# Altium PCB keyboard_3.0.PcbDoc
Units mil, origin at the board's own origin, x right, y up, seen from the top; angles counter-clockwise.
Board outline 4133.86 x 6102.36 mil, 2 copper layers (Top Layer, Bottom Layer); 89 components, 125 nets, 462 pads, 48 vias.
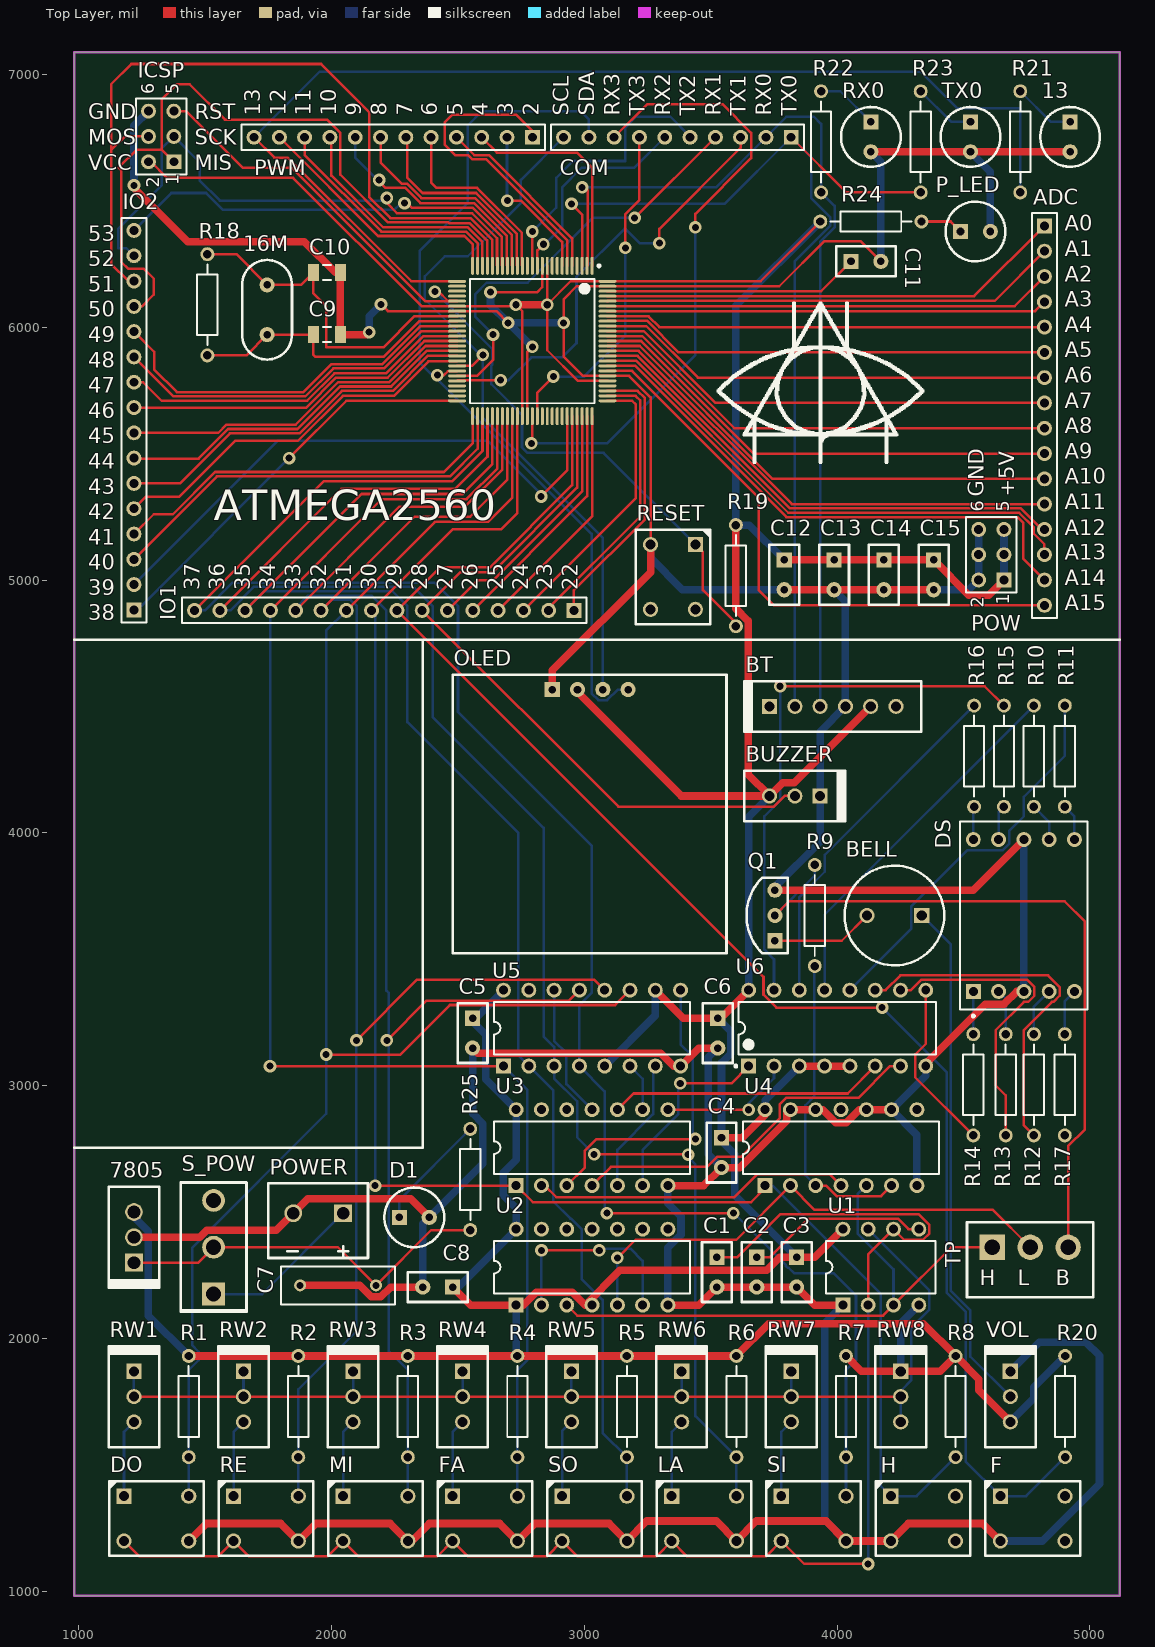
[diagram p0: Top Layer view]
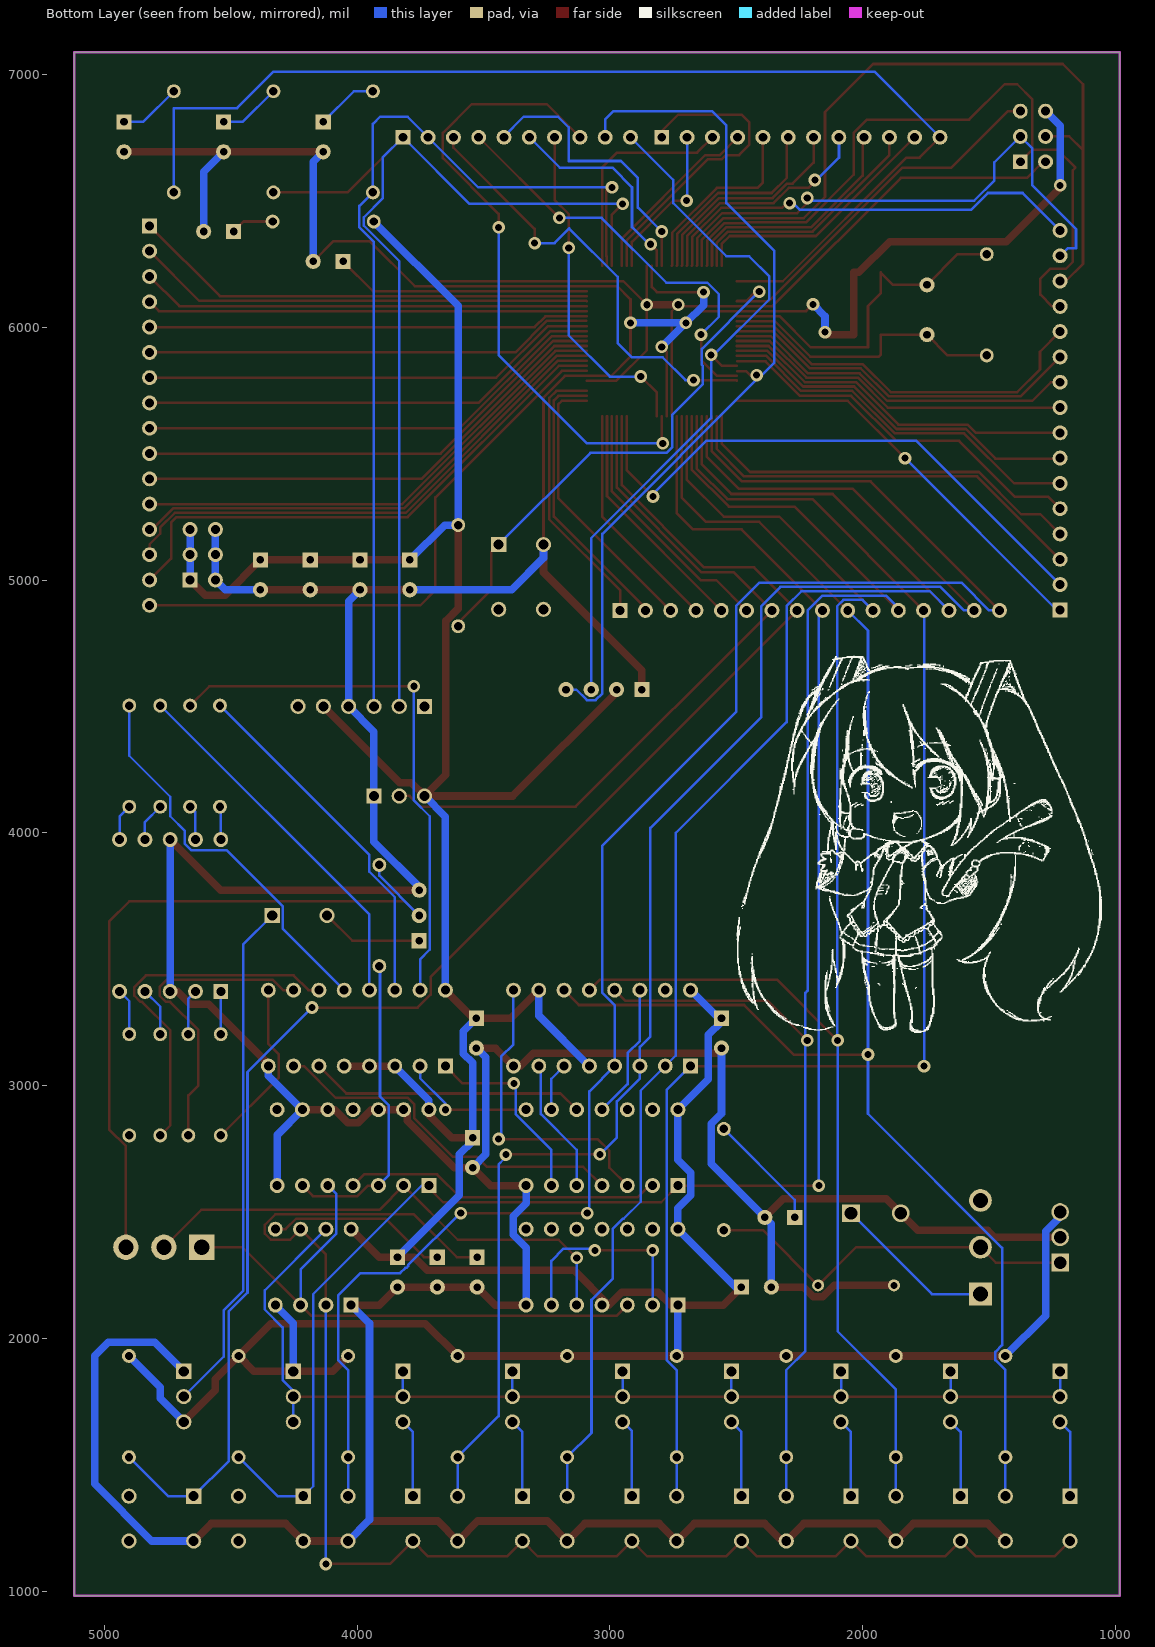
[diagram p1: Bottom Layer view, seen from below]

## Layer stack, top to bottom
Top Solder: solder mask 0.4, Solder Resist, Dk 3.5
Top Layer: signal copper 1.4
Dielectric1: dielectric 12.6, FR-4, Dk 4.8
Bottom Layer: signal copper 1.4
Bottom Solder: solder mask 0.4, Solder Resist, Dk 3.5

## Board outline
984.25,984.25 984.25,7086.61 5118.11,7086.61 5118.11,984.25

## Design rules (kind name [scope] priority, off if disabled: settings)
Clearance [All] p1: gap=7 ignorepadtopadclearanceinfootprint=FALSE except(0: Arc-Hole Track-Hole SMDPad-Hole THPad-Hole Via-Hole Fill-Hole Poly-Hole Region-Hole Text-Hole)
HoleSize [All] p1: absolutevalues=TRUE maxlimit=196.85 minlimit=0.98 maxpercent=80.000 minpercent=20.000
PolygonConnect [All] p1: connectstyle=Relief reliefconductorwidth=10 reliefentries=4 polygonreliefangle="90 Angle" airgapwidth=10
RoutingVias [All] p1: holewidth=15 width=35 viastyle="Through Hole" minholewidth=10 minwidth=30 maxholewidth=28 maxwidth=50
SolderMaskExpansion [All] p1: expansion=4
Width GND [InNet('GND')] p1: maxlimit=50 minlimit=10 preferedwidth=30
Width VCC [InNet('VCC')] p2: maxlimit=50 minlimit=10 preferedwidth=30
Width Width_other [All] p3: maxlimit=50 minlimit=10 preferedwidth=10
29 further rules are at their usual default settings.

## Classes and differential pairs
component class mega2560: 13 16M ADC C9 C10 C11 C12 C13 C14 C15 COM ICSP IO1 IO2 PWM R18 R19 R21 R22 R23 R24 RESET RX0 TX0
component class others: 7805 BT BUZZER C7 C8 D1 F OLED POWER R20 R25 S_POW TP
component class bell: BELL C4 H Q1 R8 R9 U3 U4 VOL
component class display: C5 C6 DS R10 R11 R12 R13 R14 R15 R16 R17 U5 U6
component class keyboard: C1 C2 C3 DO FA LA MI R1 R2 R3 R4 R5 R6 R7 RE RW1 RW2 RW3 RW4 RW5 RW6 RW7 RW8 SI SO U1 U2

## Components (designator, comment, footprint, x,y, rotation, side; value= is the part's Value field where it differs from the comment)
13 "LED" LED 4921.26,6811.02 r0 top
16M "CRYSTAL" CRYSTAL 1746.77,6166.88 r0 top
7805 "7805" 7805 1220.47,2401.57 r90 top
ADC "Header 16" HDR1X16 4820,6400 r270 top
ATMEGA2560 "ATmega2560-16AU" 100A_N 2795.28,5944.88 r270 top
BELL "BELL" BELL 4226.86,3673.77 r180 top
BT "BLUETOOTH" BLUETOOTH 3733.16,4500.54 r0 top
BUZZER "BUZZER" BUZZER 3833.16,4146.21 r180 top
C1 "0.1uF" CAP 3525.2,2322.83 r0 top
C2 "0.01uF" CAP 3682.68,2322.83 r0 top
C3 "0.1uF" CAP 3840.16,2322.83 r0 top
C4 "0.1uF" CAP 3543.31,2795.28 r0 top
C5 "0.1uF" CAP 2559.06,3267.72 r0 top
C6 "0.1uF" CAP 3528.35,3267.72 r0 top
C7 "Cap" RAD-0.3 2027.24,2211.57 r0 top
C8 "0.1uF" CAP 2480.31,2204.72 r270 top
C9 "Cap Semi" C1206 1982.99,5970.03 r180 top
C10 "Cap Semi" C1206 1982.99,6216.09 r180 top
C11 "0.1uF" CAP 4055.12,6259.84 r90 top
C12 "0.1uF" CAP 3791.35,5079.69 r0 top
C13 "0.1uF" CAP 3988.2,5079.69 r0 top
C14 "0.1uF" CAP 4185.05,5079.69 r0 top
C15 "0.1uF" CAP 4381.9,5079.69 r0 top
COM "Header 10" HDR1X10 3818.9,6750.39 r180 top
D1 "LED" LED 2269.65,2480.32 r90 top
DO "KEY" KEY_6*6 1181.1,1377.95 r0 top
DS "Dpy Blue-CC" H 4738.67,3673.77 r0 top
F "KEY" KEY_6*6 4645.67,1377.95 r0 top
FA "KEY" KEY_6*6 2480.32,1377.95 r0 top
H "KEY" KEY_6*6 4212.6,1377.95 r0 top
ICSP "Header 3X2" HDR2X3 1377.95,6653.54 r90 top
IO1 "Header 16" HDR1X16 2960,4880 r180 top
IO2 "Header 16" HDR1X16 1220.47,4881.89 r90 top
LA "KEY" KEY_6*6 3346.46,1377.95 r0 top
MI "KEY" KEY_6*6 2047.24,1377.95 r0 top
OLED "OLED" OLED_4pin 2874.02,4566.93 r0 top
P_LED "LED" LED 4488.19,6377.95 r90 top
POW "Header 3X2" HDR2X3 4659.93,5000 r90 top
POWER "INT" INT 2047.24,2496.78 r180 top
PWM "Header 12" HDR1X12 2795.28,6750.39 r180 top
Q1 "TRANSISTOR" TRANSISTOR 3754.42,3673.77 r90 top
R1 "Res2" AXIAL-0.4 1437.01,1732.28 r90 top
R2 "Res2" AXIAL-0.4 1870.08,1732.28 r90 top
R3 "Res2" AXIAL-0.4 2303.15,1732.28 r90 top
R4 "Res2" AXIAL-0.4 2736.22,1732.28 r90 top
R5 "Res2" AXIAL-0.4 3169.29,1732.28 r90 top
R6 "Res2" AXIAL-0.4 3602.36,1732.28 r90 top
R7 "Res2" AXIAL-0.4 4035.43,1732.28 r90 top
R8 "Res2" AXIAL-0.4 4468.5,1732.28 r90 top
R9 "Res2" AXIAL-0.4 3911.9,3673.77 r90 top
R10 "Res2" AXIAL-0.4 4778.04,4303.69 r270 top
R11 "Res2" AXIAL-0.4 4900.5,4303.69 r270 top
R12 "Res2" AXIAL-0.4 4778.04,3004.47 r90 top
R13 "Res2" AXIAL-0.4 4666.97,3004.47 r90 top
R14 "Res2" AXIAL-0.4 4538.67,3004.47 r90 top
R15 "Res2" AXIAL-0.4 4659.93,4303.69 r270 top
R16 "Res2" AXIAL-0.4 4541.82,4303.69 r270 top
R17 "Res2" AXIAL-0.4 4900.5,3004.47 r90 top
R18 "Res2" AXIAL-0.4 1510.55,6088.14 r270 top
R19 "Res2" AXIAL-0.4 3600,5017.32 r90 top
R20 "Res2" AXIAL-0.4 4901.57,1732.28 r90 top
R21 "Res2" AXIAL-0.4 4724.41,6732.28 r270 top
R22 "Res2" AXIAL-0.4 3937.01,6732.28 r270 top
R23 "Res2" AXIAL-0.4 4330.71,6732.28 r270 top
R24 "Res2" AXIAL-0.4 4133.86,6417.32 r180 top
R25 "Res2" AXIAL-0.4 2550,2630 r270 top
RE "KEY" KEY_6*6 1614.17,1377.95 r0 top
RESET "KEY" KEY_6*6 3440,5140 r270 top
RW1 "3296W" 3296W 1220.47,1771.65 r0 top
RW2 "3296W" 3296W 1653.54,1771.65 r0 top
RW3 "3296W" 3296W 2086.61,1771.65 r0 top
RW4 "3296W" 3296W 2519.68,1771.65 r0 top
RW5 "3296W" 3296W 2950,1771.65 r0 top
RW6 "3296W" 3296W 3385.83,1771.65 r0 top
RW7 "3296W" 3296W 3818.9,1771.65 r0 top
RW8 "3296W" 3296W 4251.97,1771.65 r0 top
RX0 "LED" LED 4133.86,6811.02 r0 top
S_POW "SSD1210" SS12D10 1535.43,2362.2 r90 top
SI "KEY" KEY_6*6 3779.53,1377.95 r0 top
SO "KEY" KEY_6*6 2913.39,1377.95 r0 top
TP "TEST" TEST 4763.78,2362.2 r0 top
TX0 "LED" LED 4527.56,6811.02 r0 top
U1 "NE555P" P008 4173.23,2283.46 r0 top
U2 "SN74LS74AN" N014D 3031.5,2283.46 r0 top
U3 "SN74LS04N" N014 3031.5,2755.91 r0 top
U4 "SN74LS126AN" N014 4015.75,2755.91 r0 top
U5 "SN74LS147N" N016 3031.5,3228.35 r0 top
U6 "SN74LS48N" N016D 4000.79,3228.35 r90 top
VOL "3296W" 3296W 4685.04,1771.65 r0 top

## Footprints (in the part's own frame and the unit in brackets; to place one, negate y for a bottom-side part, rotate by r counter-clockwise, add the part's x,y. Pads: shape width x height; smd on the part's side, far side on the other; paste and mask are expansions set on the pad)
100A_N [mm] "Thin QFP, 100-Leads, Body 14x14mm, Pitch 0.5mm, IPC Medium Density"
  oval 1.8x0.3 smd: 1(-7.55,6) 2(-7.55,5.5) 3(-7.55,5) 4(-7.55,4.5) 5(-7.55,4) 6(-7.55,3.5) 7(-7.55,3) 8(-7.55,2.5) 9(-7.55,2) 10(-7.55,1.5) 11(-7.55,1) 12(-7.55,0.5) 13(-7.55,0) 14(-7.55,-0.5) 15(-7.55,-1) 16(-7.55,-1.5) 17(-7.55,-2) 18(-7.55,-2.5) 19(-7.55,-3) 20(-7.55,-3.5) 21(-7.55,-4) 22(-7.55,-4.5) 23(-7.55,-5) 24(-7.55,-5.5) 25(-7.55,-6) 51(7.55,-6) 52(7.55,-5.5) 53(7.55,-5) 54(7.55,-4.5) 55(7.55,-4) 56(7.55,-3.5) 57(7.55,-3) 58(7.55,-2.5) 59(7.55,-2) 60(7.55,-1.5) 61(7.55,-1) 62(7.55,-0.5) 63(7.55,0) 64(7.55,0.5) 65(7.55,1) 66(7.55,1.5) 67(7.55,2) 68(7.55,2.5) 69(7.55,3) 70(7.55,3.5) 71(7.55,4) 72(7.55,4.5) 73(7.55,5) 74(7.55,5.5) 75(7.55,6)
  oval 0.3x1.8 smd: 26(-6,-7.55) 27(-5.5,-7.55) 28(-5,-7.55) 29(-4.5,-7.55) 30(-4,-7.55) 31(-3.5,-7.55) 32(-3,-7.55) 33(-2.5,-7.55) 34(-2,-7.55) 35(-1.5,-7.55) 36(-1,-7.55) 37(-0.5,-7.55) 38(0,-7.55) 39(0.5,-7.55) 40(1,-7.55) 41(1.5,-7.55) 42(2,-7.55) 43(2.5,-7.55) 44(3,-7.55) 45(3.5,-7.55) 46(4,-7.55) 47(4.5,-7.55) 48(5,-7.55) 49(5.5,-7.55) 50(6,-7.55) 76(6,7.55) 77(5.5,7.55) 78(5,7.55) 79(4.5,7.55) 80(4,7.55) 81(3.5,7.55) 82(3,7.55) 83(2.5,7.55) 84(2,7.55) 85(1.5,7.55) 86(1,7.55) 87(0.5,7.55) 88(0,7.55) 89(-0.5,7.55) 90(-1,7.55) 91(-1.5,7.55) 92(-2,7.55) 93(-2.5,7.55) 94(-3,7.55) 95(-3.5,7.55) 96(-4,7.55) 97(-4.5,7.55) 98(-5,7.55) 99(-5.5,7.55) 100(-6,7.55)
  silkscreen extent -7.67,-6.25 6.25,6.83, body extent -7,-7 7,7, height 1.2
3296W [mil]
  rect 60x60 hole 40: 1(0,100)
  round 60 hole 40: 2(0,0) 3(0,-100)
  silkscreen extent -100,-200 100,200
7805 [mil]
  rect 70x70 hole 50: 1(-100,0)
  round 70 hole 50: 2(0,0) 3(100,0)
  silkscreen extent -200,-100 200,100
AXIAL-0.4 [mm] "Axial Device, Thru-Hole; 2 Leads; 0.4 in Pin Spacing"
  round 1.4 hole 0.85: 1(-5.08,0) 2(5.08,0)
  silkscreen extent -4.06,-1.02 4.06,1.02
BELL [mil]
  rect 60x60 hole 40: 1(-108.27,0)
  round 60 hole 40: 2(108.27,0)
  silkscreen extent -197,-197 197,197
BLUETOOTH [mil]
  rect 60x60 hole 40: 1(0,0)
  round 60 hole 40: 2(100,0) 3(200,0) 4(300,0) 5(400,0) 6(500,0)
  silkscreen extent -100,-100 600,100
BUZZER [mil]
  rect 60x60 hole 40: 1(-100,0)
  round 60 hole 40: 2(0,0) 3(100,0)
  silkscreen extent -200,-100 200,100
C1206 [mm] "Chip Capacitor, Body 3.2x1.6mm, IPC High Density"
  rect 1.1x1.7 smd: 1(-1.35,0) 2(1.35,0)
  silkscreen extent -0.4,-0.75 0.4,0.75, body extent -1.7,-0.9 1.7,0.9, height 1.3
CAP [mil]
  rect 60x60 hole 30: 1(0,0)
  round 60 hole 30: 2(0,-118.11)
  silkscreen extent -59,-177 59,59
CRYSTAL [mil]
  round 60 hole 30: 1(0,0) 2(0,-196.85)
  silkscreen extent -98,-295 98,98
H [mm] "LED, 7-Segment Display, 14.2 mm, RHD; 10 Leads; Row Space 15.24 mm; Pitch 2.54 mm"
  rect 1.5x1.5 hole 0.9: 1(-5.08,-7.62)
  round 1.5 hole 0.9: 2(-2.54,-7.62) 3(0,-7.62) 4(2.54,-7.62) 5(5.08,-7.62) 6(5.08,7.62) 7(2.54,7.62) 8(0,7.62) 9(-2.54,7.62) 10(-5.08,7.62)
  silkscreen extent -6.4,-10.22 6.4,9.45, body extent -6.4,-9.45 6.4,9.45, height 8.25
HDR1X10 [mm] "Connector; Header; 10 Position"
  rect 1.5x1.5 hole 0.9: 1(0,0)
  round 1.5 hole 0.9: 2(2.54,0) 3(5.08,0) 4(7.62,0) 5(10.16,0) 6(12.7,0) 7(15.24,0) 8(17.78,0) 9(20.32,0) 10(22.86,0)
  silkscreen extent -1.27,-1.27 24.13,1.27
HDR1X12 [mm] "Connector; Header; 12 Position"
  rect 1.5x1.5 hole 0.9: 1(0,0)
  round 1.5 hole 0.9: 2(2.54,0) 3(5.08,0) 4(7.62,0) 5(10.16,0) 6(12.7,0) 7(15.24,0) 8(17.78,0) 9(20.32,0) 10(22.86,0) 11(25.4,0) 12(27.94,0)
  silkscreen extent -1.27,-1.27 29.21,1.27
HDR1X16 [mm] "Connector; Header; 16 Position"
  rect 1.5x1.5 hole 0.9: 1(0,0)
  round 1.5 hole 0.9: 2(2.54,0) 3(5.08,0) 4(7.62,0) 5(10.16,0) 6(12.7,0) 7(15.24,0) 8(17.78,0) 9(20.32,0) 10(22.86,0) 11(25.4,0) 12(27.94,0) 13(30.48,0) 14(33.02,0) 15(35.56,0) 16(38.1,0)
  silkscreen extent -1.27,-1.27 39.37,1.27
HDR2X3 [mm] "Connector; Header; 3x2 Position"
  rect 1.5x1.5 hole 0.9: 1(0,0)
  round 1.5 hole 0.9: 2(0,2.54) 3(2.54,0) 4(2.54,2.54) 5(5.08,0) 6(5.08,2.54)
  silkscreen extent -1.27,-1.27 6.35,3.81
INT [mil]
  rect 70x70 hole 50: 1(0,0)
  round 70 hole 50: 2(196.85,0)
  silkscreen extent -98,-118 295,177
KEY_6*6 [mil]
  rect 60x60 hole 39.37: 1(0,0)
  round 60 hole 39.37: 2(255.91,0) 3(0,-177.16) 4(255.91,-177.16)
  silkscreen extent -59,-236 315,59
LED [mil]
  rect 60x60 hole 30: 1(0,0)
  round 60 hole 30: 2(0,-118.11)
  silkscreen extent -118,-177 118,59
N014 [mm] "DIP; 14 Leads; Row Spacing 7.62 mm; Pitch 2.54 mm"
  rect 1.5x1.5 hole 0.9: 1(-7.62,-3.81)
  round 1.5 hole 0.9: 2(-5.08,-3.81) 3(-2.54,-3.81) 4(0,-3.81) 5(2.54,-3.81) 6(5.08,-3.81) 7(7.62,-3.81) 8(7.62,3.81) 9(5.08,3.81) 10(2.54,3.81) 11(0,3.81) 12(-2.54,3.81) 13(-5.08,3.81) 14(-7.62,3.81)
  silkscreen extent -9.85,-2.65 9.85,2.65
N014D [mm] "DIP; 14 Leads; Row Spacing 7.62 mm; Pitch 2.54 mm"
  rect 1.5x1.5 hole 0.9: 1(-7.62,-3.81)
  round 1.5 hole 0.9: 2(-5.08,-3.81) 3(-2.54,-3.81) 4(0,-3.81) 5(2.54,-3.81) 6(5.08,-3.81) 7(7.62,-3.81) 8(7.62,3.81) 9(5.08,3.81) 10(2.54,3.81) 11(0,3.81) 12(-2.54,3.81) 13(-5.08,3.81) 14(-7.62,3.81)
  silkscreen extent -9.85,-2.65 9.85,2.65
N016 [mm] "DIP; 16 Leads; Row Spacing 7.62 mm; Pitch 2.54 mm"
  rect 1.5x1.5 hole 0.9: 1(-8.89,-3.81)
  round 1.5 hole 0.9: 2(-6.35,-3.81) 3(-3.81,-3.81) 4(-1.27,-3.81) 5(1.27,-3.81) 6(3.81,-3.81) 7(6.35,-3.81) 8(8.89,-3.81) 9(8.89,3.81) 10(6.35,3.81) 11(3.81,3.81) 12(1.27,3.81) 13(-1.27,3.81) 14(-3.81,3.81) 15(-6.35,3.81) 16(-8.89,3.81)
  silkscreen extent -9.85,-2.65 9.85,2.65
N016D [mm] "DIP, 16-Leads, Row Spacing 7.62mm, Pitch 2.54mm, Body 19.31x6.35mm"
  rect 1.5x1.5 hole 0.9: 1(-3.81,8.89)
  round 1.5 hole 0.9: 2(-3.81,6.35) 3(-3.81,3.81) 4(-3.81,1.27) 5(-3.81,-1.27) 6(-3.81,-3.81) 7(-3.81,-6.35) 8(-3.81,-8.89) 9(3.81,-8.89) 10(3.81,-6.35) 11(3.81,-3.81) 12(3.81,-1.27) 13(3.81,1.27) 14(3.81,3.81) 15(3.81,6.35) 16(3.81,8.89)
  silkscreen extent -3.93,-9.9 2.65,10.31, body extent -3.3,-9.9 3.3,9.9, height 5.08
OLED_4pin [mil]
  rect 60x60 hole 30: 1(0,0)
  round 60 hole 30: 2(100,0) 3(200,0) 4(300,0)
  silkscreen extent -394,-1043 689,59
P008 [mm] "DIP; 8 Leads; Row Spacing 7.62 mm; Pitch 2.54 mm"
  rect 1.5x1.5 hole 0.9: 1(-3.81,-3.81)
  round 1.5 hole 0.9: 2(-1.27,-3.81) 3(1.27,-3.81) 4(3.81,-3.81) 5(3.81,3.81) 6(1.27,3.81) 7(-1.27,3.81) 8(-3.81,3.81)
  silkscreen extent -5.5,-2.65 5.5,2.65
RAD-0.3 [mm] "Radial Cap, Thru-Hole; 2 Leads; 0.3 in Pin Spacing"
  round 1.2 hole 0.7: 1(-3.81,0) 2(3.81,0)
  silkscreen extent -5.71,-1.91 5.72,1.91
SS12D10 [mil]
  rect 90x90 hole 60: 1(-185.04,0)
  round 90 hole 60: 2(0,0) 3(185.04,0)
  silkscreen extent -256,-130 256,130
TEST [mil]
  rect 100x100 hole 60: 1(-150,0)
  round 100 hole 60: 2(0,0) 3(150,0)
  silkscreen extent -250,-197 250,98
TRANSISTOR [mil]
  rect 60x60 hole 30: 1(-100,0)
  round 60 hole 30: 2(0,0) 3(100,0)
  silkscreen extent -150,-50 150,112

## Part data
ADC IO1 IO2: "Header, 16-Pin"
ATMEGA2560: "8-bit AVR Microcontroller, 4.5-5.5V, 256KB Flash, 4KB EEPROM, 8KB SRAM, 86 GPIO pins, 100-pin TQFP, Industrial Grade (-40癈 to 85癈), Pb-Free"
C1 C2 C3 C4 C5 C6 C8 C11 C12 C13 C14 C15: library part CAP
C7: "Capacitor"
C9 C10: "Capacitor (Semiconductor SIM Model)"
COM: "Header, 10-Pin"
DO F FA H LA MI RE RESET SI SO: "OMRON"
DS: "14.2 mm General Purpose Blue 7-Segment Display: CC, RH DP, Gray Surface"
ICSP POW: "Header, 3-Pin, Dual row"
OLED: "4pin"
PWM: "Header, 12-Pin"
R1 R2 R3 R4 R5 R6 R7 R8 R9 R10 R11 R12 R13 R14 R15 R16 R17 R18 R19 R20 R21 R22 R23 R24 R25: "Resistor"
U1: "Precision Timer"
U2: "Dual D-Type Positive-Edge-Triggered Flip-Flop with Preset and Clear"
U3: "Hex Inverter"
U4: "Quadruple Bus Buffer with 3-State Outputs"
U5: "10-Line to 4-Line Priority Encoder"
U6: "BCD-to-Seven-Segment Decoder/Driver"

## Via types
v1: diameter 50, hole 28, Top Layer to Bottom Layer, 48 vias

## Nets (pads, with @x,y where several pads share a name; then routed paths per layer and width w, separated by ;. In a path a pad name is that pad's centre, name@x,y a point inside that pad or via, vN(x,y) a via of type N, cw(c..) or ccw(c..) an arc to the next point about the centre after c; other vN are vias at no path point)
2: ATMEGA2560.6 PWM.1 | length 1239.7
  Top Layer w10: PWM.1 2795.28,6774.72 2730,6840 2480,6840 2450,6810 2450,6720 2490,6680 2541.63,6680 2558.63,6663 2613.93,6663 2933.07,6343.86 ATMEGA2560.6
3: ATMEGA2560.7 PWM.2 | length 627.5
  Top Layer w10: v1(2696.85,6500) 2750,6500 2913.39,6336.61 ATMEGA2560.7
  Bottom Layer w10: v1@2695.28,6501.58 PWM.2
4: ATMEGA2560.1 PWM.3 | length 874.3
  Top Layer w10: PWM.3 2655.67,6690 2972.13,6690 3031.5,6630.63 ATMEGA2560.1
5: ATMEGA2560.5 PWM.4 | length 731.6
  Top Layer w10: PWM.4 2565.67,6680 2623.39,6680 2952.76,6350.63 ATMEGA2560.5
6: ATMEGA2560.15 PWM.5 | length 751.4
  Top Layer w10: PWM.5 2395.28,6571.72 2417,6550 2577.03,6550 2754.13,6372.9 2754.13,6243.9 ATMEGA2560.15
7: ATMEGA2560.16 PWM.6 | length 815
  Top Layer w10: PWM.6 2301.23,6744.44 2301.23,6590 2361.23,6530 2572.99,6530 2734.44,6368.55 2734.44,6243.91 ATMEGA2560.16
8: ATMEGA2560.17 PWM.7 | length 861.1
  Top Layer w10: PWM.7 2195.28,6650 2278.28,6567 2300.19,6567 2357.19,6510 2568.95,6510 2714.76,6364.19 2714.76,6243.9 ATMEGA2560.17
9: ATMEGA2560.18 PWM.8 | length 941.7
  Top Layer w10: v1(2190,6581.5) 2190,6574.65 2214.65,6550 2293.15,6550 2353.15,6490 2564.91,6490 2695.07,6359.83 2695.07,6243.91 ATMEGA2560.18
  Bottom Layer w10: PWM.8 2094.65,6749.76 2094.65,6670 2190,6574.65 v1(2190,6581.5)
10: ATMEGA2560.23 PWM.9 | length 954.2
  Top Layer w10: PWM.9 2001.02,6744.65 2001.02,6598.98 2206,6394 2540.7,6394 2596.65,6338.05 2596.65,6243.91 ATMEGA2560.23
11: ATMEGA2560.24 PWM.10 | length 987.6
  Top Layer w10: PWM.10 1895.28,6680.39 2198.67,6377 2533.66,6377 2578.74,6331.92 ATMEGA2560.24
12: ATMEGA2560.25 PWM.11 | length 1024.4
  Top Layer w10: PWM.11 2185.67,6360 2526.61,6360 2559.06,6327.56 ATMEGA2560.25
13: ATMEGA2560.26 PWM.12 R21.2 | length 4568.4
  Top Layer w10: PWM.12 1775.67,6670 1828.05,6670 2316.95,6181.1 ATMEGA2560.26
  Bottom Layer w10: PWM.12 1954.88,7010 4330,7010 4474.41,6865.59 4724.41,6865.59 R21.2
22: ATMEGA2560.78 IO1.1 | length 1115.1
  Top Layer w10: IO1.1 2960,4960 3240,5240 3240,5720 3211.97,5748.03 ATMEGA2560.78
23: ATMEGA2560.77 IO1.2 | length 1107.9
  Top Layer w10: IO1.2@2860,4889.06 3221.97,5251.03 3221.97,5710 3203.62,5728.35 ATMEGA2560.77
24: ATMEGA2560.76 IO1.3 | length 1116.7
  Top Layer w10: IO1.3 3204.97,5324.97 3204.97,5693.69 3190,5708.66 ATMEGA2560.76
25: ATMEGA2560.75 IO1.4 | length 921.5
  Top Layer w10: IO1.4 3031.5,5251.5 ATMEGA2560.75
26: ATMEGA2560.74 IO1.5 | length 954.8
  Top Layer w10: IO1.5 3011.81,5331.81 ATMEGA2560.74
27: ATMEGA2560.73 IO1.6 | length 1024.1
  Top Layer w10: IO1.6 2580,5000 2641.5,5000 2992.13,5350.63 ATMEGA2560.73
28: ATMEGA2560.72 BUZZER.2 IO1.7 | length 2907.9
  Top Layer w10: ATMEGA2560.72 2972.44,5364.96 2637.48,5030 2510,5030 IO1.7 3135.79,4104.21 3750.56,4104.21 3792.56,4146.21 BUZZER.2
29: ATMEGA2560.71 F.1 IO1.8 R20.1 | length 6224.9
  Top Layer w10: ATMEGA2560.71 2952.76,5375.27 2627.48,5050 2430,5050 IO1.8 3709.26,3430.74 3709.26,3361.14 3760.69,3309.72 v1(4178.15,3309.72)
  Bottom Layer w10: v1(4178.15,3309.72) 4433,3054.86 4433,2182.96 4508.06,2107.9 4508.06,1515.56 F.1 4747.24,1377.95 R20.1
30: ATMEGA2560.60 H.1 IO1.9 R8.1 U3.1 U4.1 | length 6750.9
  Top Layer w10: IO1.9 2480,5200 2671.5,5200 2736.22,5264.73 ATMEGA2560.60 ; v1(2174.09,2605.91) U3.1 2797.4,2540 3660,2540 3715.75,2595.75 U4.1
  Bottom Layer w10: v1(2174.09,2605.91) IO1.9@2174.09,4865.91 ; U4.1 3744.09,2605.91 4173.23,2176.77 4173.23,1417.32 H.1 4314.17,1377.95 R8.1
31: ATMEGA2560.59 DO.2 IO1.10 R1.1 U5.11 | length 6251.6
  Top Layer w10: v1(1980,3124.02) 2274.02,3124.02 2469.82,3319.82 3122.97,3319.82 U5.11 ; IO1.10 2410,5230 2620,5230 2716.54,5326.54 ATMEGA2560.59
  Bottom Layer w10: DO.2 R1.1 1437.01,1876.34 1476.57,1915.9 1476.57,1948.67 1450,1975.24 1450,2360 1980,2890 v1(1980,3124.02) 1980,4800 IO1.10
32: ATMEGA2560.58 IO1.11 R2.1 RE.2 U5.12 | length 6093.3
  Top Layer w10: IO1.11 2330,5250 2549.54,5250 2696.85,5397.32 ATMEGA2560.58 ; v1(2100,3180) 2339.87,3419.87 3039.97,3419.87 U5.12
  Bottom Layer w10: RE.2 R2.1 1870.08,1800.08 2100,2030 v1(2100,3180) 2101.53,3181.53 2101.53,4897.2 2077.2,4921.53 2001.53,4921.53 IO1.11 ; U5.12@3071.65,3378.35 U5.12
33: ATMEGA2560.57 IO1.12 MI.2 R3.1 U5.13 | length 6052.2
  Top Layer w10: IO1.12 2270,5290 2530,5290 2677.17,5437.17 ATMEGA2560.57 ; v1(2220,3180) 2376.82,3336.82 2939.97,3336.82 U5.13
  Bottom Layer w10: IO1.12 1860,4890 1908.53,4938.53 2160.2,4938.53 2218.47,4880.26 2218.47,3376.65 2227.65,3367.48 2227.65,1951.84 2303.15,1876.34 R3.1 MI.2
34: ATMEGA2560.56 FA.2 IO1.13 R4.1 U5.1 | length 5815.2
  Top Layer w10: v1(1758.35,3078.35) U5.1 ; IO1.13 2200,5320 2535.96,5320 2657.48,5441.52 ATMEGA2560.56
  Bottom Layer w10: v1(1758.35,3078.35) IO1.13@1758.35,4878.35 ; U5.1 2775.78,2984.06 2775.78,1915.9 2736.22,1876.34 R4.1 FA.2
35: ATMEGA2560.55 IO1.14 R5.1 SO.2 U5.2 | length 5984.5
  Top Layer w10: IO1.14 2120,5340 2520,5340 2637.8,5457.8 ATMEGA2560.55
  Bottom Layer w10: IO1.14 1735.53,4955.53 2243.2,4955.53 2301.53,4897.2 2301.53,4438.47 2740,4000 2740,3395.61 ; 2739.97,3395.58 2739.97,3119.87 U5.2 2878.37,2981.48 2878.37,2542.11 2945.48,2474.99 2948.7,2474.99 2989.97,2433.72 2989.97,2236.74 3073.02,2153.69 3073.02,1628.55 R5.1 SO.2
36: ATMEGA2560.54 IO1.15 LA.2 R6.1 U5.3 | length 6635.3
  Top Layer w10: IO1.15 2040,5360 2490,5360 2618.11,5488.11 ATMEGA2560.54 ; v1(3040,2729.17) v1@3411.52,2729.17 ; v1(3411.52,2728.06) 3420,2719.58 v1@3420,2710
  Bottom Layer w10: IO1.15 1601.27,4880 1693.8,4972.53 2326.2,4972.53 2401.53,4897.2 2401.53,4458.47 2839.97,4020.03 2839.97,3195.83 2881.5,3154.3 U5.3 2881.5,3030 2973.02,2938.47 2973.02,2796.14 v1(3040,2729.17) ; v1(3411.52,2728.06) 3420,2719.58 3420,2710 3440,2690 3440,1694.65 R6.1 LA.2
37: ATMEGA2560.53 IO1.16 R7.1 SI.2 U5.4 | length 7277.7
  Top Layer w10: IO1.16 1970,5390 2478.43,5390 2598.43,5510 ATMEGA2560.53 ; v1(3090,2496.78) v1(3590,2496.78)
  Bottom Layer w10: IO1.16 1501.27,4880 1610.8,4989.53 2409.2,4989.53 2501.53,4897.2 2501.53,4478.47 3030,3950 3030,3368.12 2981.5,3319.62 U5.4 3081.5,2978.35 3081.5,2506.78 v1@3091.5,2496.78 ; v1@3591.61,2498.39 3798.16,2291.84 3798.16,2287.86 3805.19,2280.83 3809.17,2280.83 3830,2260 3985.63,2260 4074.99,2170.64 4074.99,1915.9 4035.43,1876.34 R7.1 SI.2
38: ATMEGA2560.50 IO2.1 | length 1620
  Top Layer w10: v1(1833.78,5481.89) 2060.55,5708.66 ATMEGA2560.50
  Bottom Layer w10: IO2.1 1233.78,4881.89 v1(1833.78,5481.89)
39: ATMEGA2560.70 IO2.2 | length 2302.2
  Top Layer w10: v1(2830,5330) 2933.07,5433.07 ATMEGA2560.70
  Bottom Layer w10: IO2.2 1788.58,5550 2620,5550 2830,5340 v1(2830,5330)
40: ATMEGA2560.52 IO2.3 | length 1667.9
  Top Layer w10: IO2.3 1548.58,5410 2469.69,5410 2578.74,5519.05 ATMEGA2560.52
41: ATMEGA2560.51 IO2.4 | length 1594.6
  Top Layer w10: IO2.4 1298.58,5260 1374.54,5260 1541.54,5427 2446.06,5427 2559.06,5540 ATMEGA2560.51
42: ATMEGA2560.42 IO2.5 | length 1517
  Top Layer w10: IO2.5 1268.58,5330 1400,5330 1620,5550 1868.11,5550 2046.46,5728.35 2248.35,5728.35 2384.36,5864.36 ATMEGA2560.42@2496.25,5864.36
43: ATMEGA2560.41 IO2.6 | length 1486.3
  Top Layer w10: IO2.6 1401.89,5381.89 1600,5580 1874.07,5580 2042.1,5748.03 2243.99,5748.03 2381.78,5885.83 ATMEGA2560.41
44: ATMEGA2560.40 IO2.7 | length 1454.6
  Top Layer w10: IO2.7 1222.36,5480 1475.96,5480 1592.96,5597 1867.03,5597 2035.06,5765.03 2236.95,5765.03 2377.43,5905.51 ATMEGA2560.40
45: ATMEGA2560.39 IO2.8 | length 1419.8
  Top Layer w10: IO2.8 1553.81,5581.89 1585.92,5614 1859.99,5614 2028.02,5782.03 2229.91,5782.03 2373.07,5925.2 ATMEGA2560.39
46: ATMEGA2560.38 IO2.9 | length 1386.5
  Top Layer w10: IO2.9 1901.89,5681.89 2020,5800 2223.83,5800 2368.72,5944.88 ATMEGA2560.38
47: ATMEGA2560.37 IO2.10 | length 1413.9
  Top Layer w10: IO2.10 1256.46,5781.89 1329.68,5708.66 1904.62,5708.66 2012.96,5817 2216.79,5817 2364.36,5964.57 ATMEGA2560.37
48: ATMEGA2560.36 IO2.11 | length 1449.4
  Top Layer w10: IO2.11 1376.7,5725.66 1897.58,5725.66 2008.6,5836.68 2209.75,5836.68 2357.32,5984.25 ATMEGA2560.36
49: ATMEGA2560.35 IO2.12 | length 1525.7
  Top Layer w10: IO2.12 1300,5902.36 1300,5832.66 1390,5742.66 1890,5742.66 2001.02,5853.68 2202.71,5853.68 2352.96,6003.94 ATMEGA2560.35
50: ATMEGA2560.22 ICSP.1 IO2.13 | length 2923.5
  Top Layer w10: IO2.13 1251.89,6081.89 1298.58,6128.58 1298.58,6191.42 1260,6230 1198.11,6230 1170,6258.11 1170,6620 1160,6630 1231.81,6701.81 1329.68,6701.81 ; ICSP.1 1329.68,6701.81 ; ATMEGA2560.22 2616.33,6243.91 2616.33,6342.41 2547.74,6411 2466.32,6411 2463.3,6414.02 2224.96,6414.02 2036.8,6602.18 2036.8,6767.6 1984.4,6820 1580,6820 1440,6960 1390,6960 1329.68,6899.68 1329.68,6701.81
51: ATMEGA2560.21 ICSP.4 IO2.14 | length 3127
  Top Layer w10: IO2.14 1198.11,6181.89 1130,6250 1130,6699.29 ; ICSP.4 1184.25,6753.54 1130,6699.29 ; ATMEGA2560.21 2637.8,6344.98 2551.76,6431.02 2233.94,6431.02 2150,6514.96 2150,6850 1960,7040 1210,7040 1130,6960 1130,6699.29
52: ATMEGA2560.20 ICSP.3 IO2.15 | length 2252
  Top Layer w10: v1(2220,6510) 2220,6490 2260.15,6449.85 2318.48,6449.85 2318.63,6450 2556.82,6450 2655.7,6351.12 2655.7,6243.91 ATMEGA2560.20
  Bottom Layer w10: IO2.15 1190,6312.36 1157.64,6312.36 1157.64,6387.64 1330,6560 1330,6705.59 ICSP.3 1480,6651.5 1480,6580 1560,6500 2233.94,6500 2223.94,6510 v1(2220,6510)
53: ATMEGA2560.19 IO2.16 | length 1751.3
  Top Layer w10: v1(2290,6490) 2300,6490 2319.13,6470.87 2559.99,6470.87 2675.39,6355.48 2675.39,6243.9 ATMEGA2560.19
  Bottom Layer w10: IO2.16 1368.58,6530 1505.96,6530 1572.96,6463 2249.27,6463 2273.12,6486.85 2303.15,6486.85 2300,6490 v1(2290,6490)
A0: ADC.1 ATMEGA2560.97 | length 1842.6
  Top Layer w10: ATMEGA2560.97 4542.05,6122.05 ADC.1
A1: ADC.2 ATMEGA2560.96 | length 1809.3
  Top Layer w10: ATMEGA2560.96 3094.3,6104.14 4624.14,6104.14 ADC.2
A2: ADC.3 ATMEGA2560.95 | length 1776.1
  Top Layer w10: ATMEGA2560.95 4702.68,6082.68 ADC.3
A3: ADC.4 ATMEGA2560.94 | length 1742.8
  Top Layer w10: ATMEGA2560.94 4782.99,6062.99 ADC.4
A4: ADC.5 ATMEGA2560.93 | length 1745.4
  Top Layer w10: ATMEGA2560.93 3093.43,6042.4 3255.26,6042.4 3297.66,6000 ADC.5
A5: ADC.6 ATMEGA2560.92 | length 1777.6
  Top Layer w10: ATMEGA2560.92@3094.3,6025.4 3248.22,6025.4 3373.62,5900 ADC.6
A6: ADC.7 ATMEGA2560.91 | length 1812
  Top Layer w10: ATMEGA2560.91 3245.64,6003.94 3449.58,5800 ADC.7
A7: ADC.8 ATMEGA2560.90 | length 1845.2
  Top Layer w10: ATMEGA2560.90 3235.75,5984.25 3520,5700 ADC.8
A8: ADC.9 ATMEGA2560.89 | length 1878.5
  Top Layer w10: ATMEGA2560.89 3230,5964.57 3594.57,5600 ADC.9
A9: ADC.10 ATMEGA2560.88 | length 1911.8
  Top Layer w10: ATMEGA2560.88 3225.12,5944.88 3670,5500 ADC.10
A10: ADC.11 ATMEGA2560.87 | length 1945
  Top Layer w10: ATMEGA2560.87 3220,5925.2 3745.2,5400 ADC.11
A11: ADC.12 ATMEGA2560.86 | length 1978.3
  Top Layer w10: ATMEGA2560.86 3215.64,5905.51 3821.15,5300 ADC.12
A12: ADC.13 ATMEGA2560.85 | length 2011.6
  Top Layer w10: ATMEGA2560.85 3211.29,5885.83 3814.11,5283 4727,5283 4810,5200 ADC.13
A13: ADC.14 ATMEGA2560.84 | length 2083.5
  Top Layer w10: ATMEGA2560.84 3206.93,5866.14 3807.07,5266 4719.96,5266 4778.47,5207.49 4778.47,5182.8 4820,5141.27 ADC.14
A14: ADC.15 ATMEGA2560.83 | length 2161.2
  Top Layer w10: ATMEGA2560.83 3202.57,5846.46 3800.03,5249 4712.92,5249 4735.29,5226.62 4735.29,5084.71 ADC.15
A15: ADC.16 ATMEGA2560.82 | length 2326.2
  Top Layer w10: ATMEGA2560.82 3190,5826.77 3690,5326.77 3690,4960 3750,4900 ADC.16
B: Q1.2 R9.2 TP.3 | length 2862.6
  Top Layer w10: Q1.2 3810.65,3730 4900,3730 4980.2,3649.8 4980.2,2828.23 4913.78,2761.81 TP.3
  Bottom Layer w10: Q1.2 3911.9,3831.25 R9.2
GND: 13.2 7805.2 ATMEGA2560.11 ATMEGA2560.32 ATMEGA2560.62 ATMEGA2560.81 ATMEGA2560.99 BT.4 BUZZER.1 C1.2 C2.2 C3.2 C4.2 C5.2 C6.2 C7.1 C8.2 C9.1 C10.1 C11.2 C12.2 C13.2 C14.2 C15.2 D1.2 DO.4 DS.3 DS.8 F.3 FA.4 H.3 ICSP.6 LA.4 MI.4 OLED.1 P_LED.2 POW.2 POW.4 POW.6 POWER.2 Q1.3 RE.4 RESET.3 RX0.2 SI.4 SO.4 TX0.2 U1.1 U2.7 U3.7 U4.7 U4.9 U4.10 U4.12 U4.13 U5.8 U6.8 VOL.1 | length 26753.8
  Top Layer w10: v1(2197.24,6090) 2224.25,6062.99 ATMEGA2560.32 2653.89,6062.99 v1(2700,6016.88) ; v1(2630,6138.14) 2814.96,6138.14 2834.65,6157.83 ATMEGA2560.11 ; ATMEGA2560.62 2775.59,5901.92 v1(2795.28,5921.61) ; RESET.3 3262.84,5722.28 3178.03,5807.09 ATMEGA2560.81 2995.04,5807.09 2918.9,5883.23 v1(2918.9,6016.88) 2918.9,6109.65 2970.66,6161.42 ATMEGA2560.99 3771.42,6161.42 3950,6340 4093.07,6340 C11.2
  Top Layer w30: 7805.2 1480.05,2401.57 1507.68,2429.2 1782.82,2429.2 POWER.2 1907.39,2553.78 2314.3,2553.78 D1.2 ; v1(1220.47,6560) 1220.47,6550 1432.77,6337.7 1894.47,6337.7 2016.07,6216.09 C10.1 C9.1 2140.03,5970.03 v1(2150,5980) ; DO.4 1506.22,1270 1800.87,1270 RE.4 1939.29,1270 2233.94,1270 MI.4 2318.55,1200.79 2387.76,1270 2667.01,1270 FA.4 2805.43,1270 3100.08,1270 SO.4 3248.5,1280 3523.15,1280 LA.4 3681.57,1280 3956.22,1280 SI.4 H.3 4281.81,1270 4576.46,1270 F.3 ; C7.1 2112.72,2211.57 2158.35,2165.95 2196.14,2165.95 2234.91,2204.72 C8.2 ; C5.2 2578.79,3129.87 3302.84,3129.87 3354.37,3078.35 U5.8 3452.76,3149.61 C6.2 ; OLED.1 2874.02,4642.52 3262.84,5031.34 RESET.3 ; U2.7 3453.94,2133.46 C1.2 C2.2 C3.2 3911.42,2133.46 U1.1 ; U3.7 3472.05,2605.91 C4.2 3616.14,2677.17 3801.22,2862.25 3801.22,2891.38 U4.13 U4.12 3942.88,2905.91 3994.4,2854.38 4037.09,2854.38 4088.62,2905.91 U4.10 U4.9 ; Q1.3 4538.67,3773.77 DS.8 ; C12.2 C13.2 C14.2 C15.2 ; RX0.2 TX0.2 13.2 ; U6.8 4350.79,3086.68 4586.35,3322.24 4660.02,3322.24 4711.54,3373.77 DS.3
  Bottom Layer w30: v1(1220.47,6560) 1220.47,6796.06 ICSP.6 ; v1(2150,5980) 2150,6042.76 v1(2197.24,6090) ; C8.2 2362.2,2454.76 D1.2 2599.56,2692.12 2599.56,2850.53 2559.06,2891.03 C5.2 ; v1(2630,6138.14) 2630,6086.88 v1(2700,6016.88) ; v1(2795.28,5921.61) v1(2700,6016.88) ; v1(2918.9,6016.88) v1(2700,6016.88) ; RESET.3 3262.84,5087.16 3388.43,4961.57 C12.2 ; U2.7 3331.5,2360.59 3383.02,2412.12 3383.02,2484.99 3331.5,2536.52 U3.7 ; C6.2 3491.31,3112.57 3491.31,2729.17 C4.2 ; Q1.3 3754.42,3786.37 3933.16,3965.11 BUZZER.1 3933.16,4400.54 BT.4 4033.16,4916.61 C13.2 ; U1.1 3950.79,2061.02 3950.79,1285.43 SI.4 ; RX0.2 4173.23,6653.54 C11.2 ; U4.7 4315.75,2805.91 U4.9 4350.79,3040.95 U6.8 ; C15.2 4521.51,4961.57 POW.2 POW.4 POW.6 ; TX0.2 4606.3,6614.17 P_LED.2 ; F.3 4810.79,1200.79 5037.72,1427.72 5037.72,1932.28 4983.39,1986.61 4800,1986.61 VOL.1 ; DS.3 DS.8
H: TP.1 U1.3 U2.3 U4.5 | length 2356.6
  Top Layer w10: U2.3 2973.02,2091.94 4181.7,2091.94 U1.3 4451.97,2362.2 TP.1
  Bottom Layer w10: U4.5 4081.7,2571.86 4081.7,2416.26 4223.23,2274.74 U1.3
L: TP.2 U2.5 U4.2 | length 2038.2
  Top Layer w10: v1(3131.5,2320) 3203.43,2391.94 3601.78,2391.94 U4.2 3911.65,2510 4615.98,2510 TP.2
  Bottom Layer w10: U2.5 v1(3131.5,2320)
Net13_1: 13.1 R21.1 | length 247.1
  Bottom Layer w10: R21.1 4845.67,6811.02 13.1
Net7805_1: 7805.1 C7.2 R25.2 S_POW.2 | length 1507.5
  Top Layer w10: 7805.1 1474.8,2301.57 S_POW.2 2026.61,2362.2 C7.2 2395.67,2430 R25.2
Net_33: 16M.1 ATMEGA2560.33 C10.2 R18.1 | length 1375.9
  Top Layer w10: R18.1 1625.51,6288.14 16M.1 1880.63,6166.88 C10.2 1929.84,6132.83 1980,6082.68 1980,5920 2206.38,5920 2329.69,6043.31 ATMEGA2560.33
Net_34: 16M.2 ATMEGA2560.34 C9.2 R18.2 | length 1162.4
  Top Layer w10: R18.2 1664.88,5888.14 16M.2 C9.2 1929.84,5890 1936.62,5883.23 2208.21,5883.23 2348.61,6023.62 ATMEGA2560.34
Net_98: ATMEGA2560.98 C11.1 | length 1011.5
  Top Layer w10: ATMEGA2560.98 3937.01,6141.73 C11.1
NetBELL_1: BELL.1 VOL.2 | length 2047.1
  Bottom Layer w10: BELL.1 4450,3558.89 4450,2190 4527.56,2112.44 4527.56,1929.14 VOL.2
NetBELL_2: BELL.2 Q1.1 | length 405.6
  Top Layer w10: Q1.1 4018.59,3573.77 BELL.2
NetC1_1: C1.1 DO.3 FA.3 LA.3 MI.3 RE.3 SI.3 SO.3 U1.2 U1.6 | length 5776.7
  Top Layer w10: DO.3 1241.89,1140 1553.39,1140 RE.3 1674.96,1140 1986.46,1140 MI.3 2108.03,1140 2419.53,1140 FA.3 2541.1,1140 2852.6,1140 SO.3 2974.17,1140 3285.67,1140 LA.3 3407.24,1140 3718.74,1140 SI.3 3870.32,1110 v1(4123.23,1110) ; C1.1 3605.71,2322.83 3774.86,2491.99 4323.43,2491.99 4364.76,2450.67 4364.76,2416.26 4340.43,2391.94 4264.76,2391.94 U1.6 4123.23,2333.46 U1.2
  Bottom Layer w10: v1(4123.23,1110) U1.2
NetC2_1: C2.1 U1.5 | length 720.8
  Top Layer w10: C2.1 3735.61,2322.83 3887.76,2474.99 4240.43,2474.99 4281.96,2433.46 U1.5
NetD1_1: D1.1 R25.1 | length 465.8
  Bottom Layer w10: D1.1 2269.65,2549.65 R25.1
NetDO_1: DO.1 RW1.3 | length 310
  Bottom Layer w10: DO.1 1181.1,1632.28 RW1.3
NetDS_1: DS.1 R14.2 | length 169.3
  Bottom Layer w10: R14.2 DS.1
NetDS_2: DS.2 R13.2 | length 181
  Bottom Layer w10: DS.2 4666.97,3345.47 R13.2
NetDS_4: DS.4 R12.2 | length 194.4
  Bottom Layer w10: R12.2 4778.04,3313.14 DS.4
NetDS_5: DS.5 R17.2 | length 185.1
  Bottom Layer w10: R17.2 4900.5,3335.6 DS.5
NetDS_6: DS.6 R11.2 | length 145.7
  Bottom Layer w10: R11.2 4938.67,4065.52 DS.6
NetDS_7: DS.7 R10.2 | length 155
  Bottom Layer w10: R10.2 4838.67,4043.06 DS.7
NetDS_9: DS.9 R15.2 | length 138.7
  Bottom Layer w10: DS.9 4638.67,4082.43 R15.2
NetDS_10: DS.10 R16.2 | length 126.8
  Bottom Layer w10: DS.10 R16.2@4538.67,4100.54
NetFA_1: FA.1 RW4.3 | length 310
  Bottom Layer w10: FA.1 2480.32,1632.28 RW4.3
NetLA_1: LA.1 RW6.3 | length 310
  Bottom Layer w10: LA.1 3346.46,1632.28 RW6.3
NetMI_1: MI.1 RW3.3 | length 310
  Bottom Layer w10: MI.1 2047.24,1632.28 RW3.3
NetP_LED_1: P_LED.1 R24.1 | length 170.6
  Top Layer w10: R24.1 4448.82,6417.32 P_LED.1
NetPOWER_1: POWER.1 S_POW.1 | length 644.2
  Bottom Layer w10: S_POW.1 1727.63,2177.17 POWER.1
NetR9_1: R9.1 U4.3 U4.6 | length 1235.1
  Top Layer w10: U4.3 3957.02,2605.91 3998.55,2564.38 4174.22,2564.38 U4.6
  Bottom Layer w10: R9.1 3909.26,3471.13 3909.26,2958.15 3874.22,2923.11 3874.22,2647.43 U4.3
NetR10_1: R10.1 U6.13 | length 1468
  Bottom Layer w10: U6.13 3951.46,3379.02 3951.46,3677.1 R10.1
NetR11_1: R11.1 U6.12 | length 1558.9
  Bottom Layer w10: U6.12 4293.13,3620.69 4293.13,3708.74 4516.63,3932.24 4655.87,3932.24 4680.2,3956.56 4680.2,4007.76 4738.48,4066.04 4738.48,4143.25 4900.5,4305.26 R11.1
NetR12_1: R12.1 U6.11 | length 1437.8
  Top Layer w10: U6.11 4192.06,3378.35 4250.59,3436.87 4834.29,3436.87 4880.2,3390.97 4880.2,3356.56 4855.87,3332.24 4849.86,3332.24 4738.48,3220.86 4738.48,2844.03 R12.1
NetR13_1: R13.1 U6.10 | length 1234.8
  Top Layer w10: U6.10 4292.06,3378.35 4333.59,3419.87 4751.29,3419.87 4780.2,3390.97 4780.2,3356.56 4755.87,3332.24 4738.79,3332.24 4627.41,3220.86 4627.41,3001.73 4666.97,2962.17 R13.1
NetR14_1: R14.1 U6.9 | length 686.1
  Top Layer w10: U6.9 4350.79,3166.39 4309.26,3124.86 4309.26,3033.89 R14.1
NetR15_1: R15.1 U6.15 | length 2159.9
  Top Layer w10: v1(3775.16,4580) 4583.62,4580 R15.1
  Bottom Layer w10: U6.15 3750.79,3500.43 3712.42,3538.8 3712.42,4066.07 3775.16,4128.81 v1(3775.16,4580)
NetR16_1: R16.1 U6.14 | length 1411.6
  Bottom Layer w10: U6.14 3850.79,3746.09 3951.46,3846.76 3951.46,3913.33 R16.1
NetR22_1: R22.1 RX0.1 | length 247.1
  Bottom Layer w10: R22.1 4012.6,6932.28 RX0.1
NetR23_1: R23.1 TX0.1 | length 247.1
  Bottom Layer w10: R23.1 4451.97,6811.02 TX0.1
NetRE_1: RE.1 RW2.3 | length 310
  Bottom Layer w10: RE.1 1614.17,1632.28 RW2.3
NetRW1_1: RW1.1 RW1.2 RW2.1 RW2.2 RW3.1 RW3.2 RW4.1 RW4.2 RW5.1 RW5.2 RW6.1 RW6.2 RW7.1 RW7.2 RW8.2 RW8.3 U1.7 | length 4640.1
  Top Layer w10: RW1.2 RW2.2 RW3.2 RW4.2 RW6.2 RW7.2 RW8.2
  Bottom Layer w10: RW1.2 RW1.1 ; RW2.2 RW2.1 ; RW3.2 RW3.1 ; RW4.2 RW4.1 ; RW5.2 RW5.1 ; RW6.2 RW6.1 ; RW7.2 RW7.1 ; U1.7 4364.76,2191.94 4364.76,2116.26 4293.97,2045.48 4293.97,1836.68 4251.97,1794.68 RW8.2 RW8.3
NetRW5_3: RW5.3 SO.1 | length 308.9
  Bottom Layer w10: SO.1 2913.39,1635.04 RW5.3
NetRW7_3: RW7.3 SI.1 | length 310
  Bottom Layer w10: SI.1 3779.53,1632.28 RW7.3
NetU2_2: U2.2 U2.6 | length 825.2
  Top Layer w10: v1(2831.5,2350) v1(3060,2350)
  Bottom Layer w10: U2.2 v1(2831.5,2350) v1@2831.5,2360.59 ; v1(3060,2350) 3067,2357 3183,2357 3231.5,2308.5 U2.6
NetU3_2: U3.2 U4.4 | length 1258.8
  Top Layer w10: U3.2 2844.09,2605.91 2890,2560 3593.82,2560 3683.82,2650 3971.65,2650 U4.4
NetU3_3: U3.3 U5.9 | length 1236.6
  Top Layer w10: U3.3 3003,2677.41 3003,2744.49 3048.51,2790 v1(3440,2790)
  Bottom Layer w10: U5.9 3381.5,3164.33 3430,3115.83 3430,2800 v1(3440,2790)
NetU3_4: U3.4 U6.7 | length 1447.2
  Top Layer w10: U3.4 3105.59,2680 3486.75,2680 3525.91,2719.17 3619.95,2719.17 3774.22,2873.43 3774.22,2928.41 3798.81,2953 4084.17,2953 4209.52,3078.35 U6.7
NetU3_5: U3.5 U5.7 | length 534.6
  Bottom Layer w10: U3.5 3131.5,2747.18 3273.02,2888.7 3273.02,3069.87 U5.7
NetU3_6: U3.6 U6.1 | length 790.1
  Top Layer w10: v1@3390,3020 v1(3380,3010) 3582.44,3010 U6.1
  Bottom Layer w10: U3.6 3231.5,2747.18 3373.02,2888.7 v1@3373.02,3010 ; v1(3380,3010) v1@3390,3020
NetU3_8: U3.8 U6.2 | length 533.2
  Top Layer w10: U3.8 v1(3650.79,2905.91)
  Bottom Layer w10: v1(3650.79,2905.91) 3650.79,2930.16 3750.79,3030.16 U6.2
NetU3_9: U3.9 U5.6 | length 193.2
  Bottom Layer w10: U5.6 3231.5,3028.35 U3.9
NetU3_10: U3.10 U6.6 | length 1090.7
  Top Layer w10: U3.10 3195.59,2970 4042.44,2970 U6.6
NetU3_11: U3.11 U5.14 | length 534.6
  Bottom Layer w10: U5.14 2881.5,3178.35 2930,3129.84 2930,3007.4 U3.11
RST: ATMEGA2560.30 ICSP.5 R19.1 RESET.1 | length 3516.3
  Top Layer w10: ICSP.5 1426.46,6853.54 1650,6630 1844.01,6630 2371.65,6102.36 ATMEGA2560.30 2496.25,6104.14 2461.09,6104.14 2425.23,6140 v1(2410,6140) ; RESET.1 3470,5110 3470,4960 3600,4830 R19.1
  Bottom Layer w10: v1@2420,6130.47 2637,5913.47 2637,5850.27 2633,5846.27 2633,5774.67 2754.5,5653.18 2754.5,5524.67 2776.17,5503 3077,5503 RESET.1
RX0: ATMEGA2560.2 BT.3 COM.2 R22.2 | length 3748
  Top Layer w10: v1(2992.13,6552.33) 3003.82,6552.33 3014.5,6541.65 3014.5,6279.98 3013.59,6279.07 3013.59,6243.9 ATMEGA2560.2
  Bottom Layer w10: v1(2992.13,6552.33) 3520.83,6552.33 COM.2 3800,6831.5 3908.5,6831.5 3937.01,6802.99 R22.2 3990.42,6478.87 3990.42,6393.89 3933.16,6336.64 BT.3
RX1: ATMEGA2560.45 COM.4 | length 1663.1
  Top Layer w10: ATMEGA2560.45 2577.03,5807.09 2640,5870.06 v1(2640,5970.03) ; v1(3200,6431.5) COM.4
  Bottom Layer w10: v1(2640,5970.03) 2570,6040.03 2570,6130.47 2614.67,6175.14 2777,6175.14 3033.35,6431.5 v1(3200,6431.5)
RX2: ATMEGA2560.12 COM.6 | length 842.6
  Top Layer w10: ATMEGA2560.12 2814.96,6303.47 v1(2839.05,6327.56)
  Bottom Layer w10: v1(2839.05,6327.56) 2845.67,6327.56 2913,6394.89 2913,6552.33 2990.67,6630 3198.5,6630 COM.6
RX3: ATMEGA2560.63 COM.8 | length 2514.6
  Top Layer w10: v1(2791.5,5540) 2795.28,5543.78 ATMEGA2560.63 ; COM.8 3250,6881.5 3546.52,6881.5 3660.43,6767.6 3660.43,6667.75 3440,6447.32 v1(3440,6394)
  Bottom Layer w10: v1(2791.5,5540) 3090,5540 3440,5890 v1(3440,6394)
SCL: ATMEGA2560.43 COM.10 OLED.3 | length 2881
  Top Layer w10: ATMEGA2560.43 2556.46,5846.46 v1(2600,5890)
  Bottom Layer w10: COM.10 2750,6581.5 2750,6490 2540,6280 2450,6280 2370,6200 2370,6110 2590,5890 v1(2600,5890) 2600,5640 3074.02,5165.98 OLED.3
SDA: ATMEGA2560.44 COM.9 OLED.4 | length 3448.5
  Top Layer w10: v1(2420,5810) 2446.1,5810 2461.09,5824.99 ATMEGA2560.44@2496.25,5824.99
  Bottom Layer w10: COM.9 3018.9,6821.1 2986.46,6853.54 2596.54,6853.54 2540,6797 2540,6490 2350,6300 2350,5860 2408.84,5801.16 2411.16,5801.16 2412.33,5800 3030,5182.33 3030,4551.55 3056.62,4524.93 3091.41,4524.93 3133.41,4566.93 OLED.4
SIG: R17.1
TX0: ATMEGA2560.3 BT.2 COM.1 R23.2 | length 4214.7
  Top Layer w10: v1(2950,6486.85) 2992.13,6444.72 ATMEGA2560.3 ; COM.1 4037.01,6532.28 R23.2
  Bottom Layer w10: v1(2950,6486.85) 3555.35,6486.85 COM.1 3897.45,6671.84 3897.45,6509.68 3973.42,6433.71 3973.42,6400.94 3833.16,6260.68 3833.16,5114.84 3833.35,5114.66 3833.35,5044.72 3833.16,5044.53 3833.16,4979.16 3833.35,4978.97 3833.35,4944.18 3833.16,4943.99 BT.2
TX1: ATMEGA2560.46 COM.3 | length 1778.4
  Top Layer w10: ATMEGA2560.46 2499.81,5789.18 2669.18,5789.18 v1(2670,5790) ; v1(3297.66,6331.92) 3297.66,6387.66 3618.9,6708.9 COM.3
  Bottom Layer w10: v1(2670,5790) 2701.5,5790 2791.5,5880 2913.39,5880 2970,5936.61 2970,6198.82 3161.18,6390 3219.27,6331.92 v1(3297.66,6331.92)
TX2: ATMEGA2560.13 COM.5 | length 1129.7
  Top Layer w10: ATMEGA2560.13 v1(2795.28,6377.95)
  Bottom Layer w10: v1(2795.28,6377.95) 2890,6472.68 2890,6590 2956.54,6656.54 3163,6656.54 3163,6788.98 3205.51,6831.5 3341.42,6831.5 3419.37,6753.54 3418.9,6753.07 COM.5
TX3: ATMEGA2560.64 COM.7 | length 1341.3
  Top Layer w10: ATMEGA2560.64 2814.96,5740.95 v1(2878.37,5804.35) ; v1(3163,6313) 3163,6446.82 3218.9,6502.72 COM.7
  Bottom Layer w10: v1(2878.37,5804.35) 3000,5804.35 3163,5967.35 v1(3163,6313)
VCC: 7805.3 ATMEGA2560.10 ATMEGA2560.31 ATMEGA2560.61 ATMEGA2560.80 ATMEGA2560.100 BT.5 BUZZER.3 C3.1 C4.1 C5.1 C6.1 C8.1 C12.1 C13.1 C14.1 C15.1 ICSP.2 OLED.2 POW.1 POW.3 POW.5 R1.2 R2.2 R3.2 R4.2 R5.2 R6.2 R7.2 R8.2 R19.2 R20.2 R24.2 RW8.1 U1.4 U1.8 U2.1 U2.4 U2.14 U3.14 U4.14 U5.5 U5.10 U5.16 U6.3 U6.4 U6.5 U6.16 VOL.3 | length 21519.2
  Top Layer w10: ICSP.2@1287.78,6653.54 1351.33,6590 1850,6590 2357.32,6082.68 ATMEGA2560.31 v1@2724.33,6082.68 ; v1(2730,6088.35) 2755.91,6062.44 ATMEGA2560.61 ; ATMEGA2560.10 v1(2854.33,6088.35) ; ATMEGA2560.80 2975.35,5787.4 2854.33,5908.42 v1(2854.33,6088.35) ; R24.2 3697.64,6181.1 ATMEGA2560.100 2947.09,6181.1 v1(2854.33,6088.35)
  Top Layer w30: ICSP.2 ICSP.2@1287.78,6653.54 ; R1.2 R2.2 R3.2 R4.2 R5.2 R6.2 3730.08,2060 4340.79,2060 R8.2 ; C8.1 2551.57,2133.46 U2.1 2758.63,2133.46 2810.15,2184.99 2952.84,2184.99 3004.37,2133.46 3141.74,2270.83 3721.79,2270.83 3773.79,2322.83 C3.1 3912.6,2322.83 U1.8 ; v1(2730,6088.35) v1(2854.33,6088.35) ; OLED.2 2974.02,4555.98 3383.79,4146.21 BUZZER.3 ; U5.10 3392.13,3267.72 C6.1 3540.16,3267.72 U6.16 ; C4.1 3625.28,2795.28 3715.75,2885.75 U4.14 ; R19.2 3600,4887.41 3649.56,4837.85 3649.56,4229.81 BUZZER.3 ; C12.1 C13.1 C14.1 C15.1 4521.59,4940 4599.93,4940 POW.1 ; U6.3 U6.4 U6.5 ; R7.2 4096.06,1871.65 RW8.1 4407.87,1871.65 R8.2 ; BT.5 3830.83,4198.21 3785.16,4198.21 BUZZER.3 ; VOL.3 4560,1796.69 4560,1840.79 R8.2
  Bottom Layer w30: 7805.3 1220.47,2482.18 1277.47,2425.18 1277.47,2091.82 R1.2 ; C8.1 2502.76,2204.72 U2.14 2731.5,2515.74 2679.97,2567.27 2679.97,2657.43 2731.5,2708.96 U3.14 2611.06,3026.35 2611.06,3201.61 2559.06,3253.61 2559.06,3255.91 U5.16 ; R4.2@2731.5,1937.01 U2.1 ; U5.5 3281.5,3278.35 U5.10 ; C6.1 3580.35,3215.72 3580.35,3128.07 3543.31,3091.03 C4.1 3543.31,2781.17 3595.31,2729.17 3595.31,2567.68 C3.1 ; U6.16 3650.79,4063.83 BUZZER.3 ; U4.14 3715.75,2943.31 U6.3 ; C12.1 3653.71,5217.32 R19.2 3600,6083.46 R24.2 ; RW8.1 4251.97,2062.2 U1.4 ; POW.1 POW.3 POW.5 ; VOL.3 4778.04,1764.66 4778.04,1808.75 R20.2
pads on no net: ATMEGA2560.4 ATMEGA2560.8 ATMEGA2560.9 ATMEGA2560.14 ATMEGA2560.27 ATMEGA2560.28 ATMEGA2560.29 ATMEGA2560.47 ATMEGA2560.48 ATMEGA2560.49 ATMEGA2560.65 ATMEGA2560.66 ATMEGA2560.67 ATMEGA2560.68 ATMEGA2560.69 ATMEGA2560.79 BT.1 BT.6 F.2 F.4 H.2 H.4 RESET.2 RESET.4 S_POW.3 U2.8 U2.9 U2.10 U2.11 U2.12 U2.13 U3.12 U3.13 U4.8 U4.11 U5.15

## Keep-outs
Keep-Out Layer:
  the board outline again, w10

## Silkscreen, mask and mechanical layers (free items; w line width, h text height)
Top Overlay:
  drawing of 1053 lines, arcs and shapes, not listed
  text "13" at 1718.77,6834.63 h60 r90
  text "12" at 1820,6834.63 h60 r90
  text "11" at 1920,6834.63 h60 r90
  text "10" at 2020,6834.63 h60 r90
  text "9" at 2120,6834.63 h60 r90
  text "8" at 2220,6834.63 h60 r90
  text "7" at 2320,6834.63 h60 r90
  text "6" at 2420,6834.63 h60 r90
  text "5" at 2520,6834.63 h60 r90
  text "4" at 2620,6834.63 h60 r90
  text "3" at 2720,6834.63 h60 r90
  text "2" at 2820,6834.63 h60 r90
  text "SCL" at 2940,6834.63 h60 r90
  text "SDA" at 3040,6834.63 h60 r90
  text "RX3" at 3140,6834.63 h60 r90
  text "TX3" at 3240,6834.63 h60 r90
  text "RX2" at 3340,6834.63 h60 r90
  text "TX2" at 3440,6834.63 h60 r90
  text "RX1" at 3540,6834.63 h60 r90
  text "TX1" at 3640,6834.63 h60 r90
  text "RX0" at 3740,6834.63 h60 r90
  text "TX0" at 3840,6834.63 h60 r90
  text "GND" at 1040,6820.63 h60
  text "RST" at 1460,6820.63 h60
  text "MOS" at 1040,6720.63 h60
  text "SCK" at 1460,6720.63 h60
  text "VCC" at 1040,6620.63 h60
  text "MIS" at 1460,6620.63 h60
  text "A0" at 4900,6380 h60
  text "53" at 1040,6340 h60
  text "A1" at 4900,6280 h60
  text "52" at 1040,6240 h60
  text "A2" at 4900,6180 h60
  text "51" at 1040,6140 h60
  text "A3" at 4900,6080 h60
  text "50" at 1040,6040 h60
  text "A4" at 4900,5980 h60
  text "49" at 1040,5940 h60
  text "A5" at 4900,5880 h60
  text "48" at 1040,5840 h60
  text "A6" at 4900,5780 h60
  text "47" at 1040,5740 h60
  text "A7" at 4900,5680 h60
  text "46" at 1040,5640 h60
  text "A8" at 4900,5580 h60
  text "45" at 1040,5540 h60
  text "A9" at 4900,5480 h60
  text "44" at 1040,5440 h60
  text "A10" at 4900.5,5380 h60
  text "43" at 1040,5340 h60
  text "GND" at 4579.93,5329.06 h60 r90
  text "+5V" at 4699.93,5329.06 h60 r90
  text "A11" at 4900.5,5280 h60
  text "42" at 1040,5240 h60
  text "ATMEGA2560" at 1535.43,5236.22 h120
  text "A12" at 4900,5177.32 h60
  text "41" at 1040,5140 h60
  text "A13" at 4900.5,5079.69 h60
  text "40" at 1040,5040 h60
  text "A14" at 4900.5,4980 h60
  text "37" at 1480,4960 h60 r90
  text "36" at 1580,4960 h60 r90
  text "35" at 1680,4960 h60 r90
  text "34" at 1780,4960 h60 r90
  text "33" at 1880,4960 h60 r90
  text "32" at 1980,4960 h60 r90
  text "31" at 2080,4960 h60 r90
  text "30" at 2180,4960 h60 r90
  text "29" at 2280,4960 h60 r90
  text "28" at 2380,4960 h60 r90
  text "27" at 2480,4960 h60 r90
  text "26" at 2580,4960 h60 r90
  text "25" at 2680,4960 h60 r90
  text "24" at 2780,4960 h60 r90
  text "23" at 2874.02,4960 h60 r90
  text "22" at 2974.02,4960 h60 r90
  text "39" at 1040,4940 h60
  text "A15" at 4900.5,4880 h60
  text "38" at 1040,4840 h60
Bottom Overlay:
  drawing of 7171 lines, arcs and shapes, not listed
Mechanical 1:
  the board outline again, w10

## Text inside footprints (layer, text, board x,y; h text height)
ICSP: Top Overlay "1" at 1397.95,6560 h50 r90; Top Overlay "2" at 1320,6550 h50 r90; Top Overlay "5" at 1397.95,6920 h50 r90; Top Overlay "6" at 1300,6920 h50 r90
POW: Top Overlay "1" at 4679.93,4902.52 h50 r90; Top Overlay "2" at 4579.93,4890 h50 r90; Top Overlay "5" at 4679.93,5269.32 h50 r90; Top Overlay "6" at 4579.93,5270 h50 r90
TP: Top Overlay "B" at 4863.78,2212.2 h60; Top Overlay "L" at 4713.78,2212.2 h60; Top Overlay "H" at 4563.78,2212.2 h60